# EAGLE board CT_schematic (EAGLE 7.6.0)

Size 100 x 80 mm. Coordinates in mm from the lower left corner, seen from the top.
Outline: 0,0 100,0 100,80 0,80 0,0
Copper layers (1*16): Top 0.035mm / dielectric 1.5mm / Bottom 0.035mm
Design rules "default": minimum track width 10mil, minimum drill 24mil, track to track 8mil, track to pad 8mil, pad to pad 8mil, via to via 8mil, smd to smd 8mil, copper to edge 40mil, drill to drill 8mil, minimum pad ring 10mil, minimum via ring 8mil, stop-mask expansion 4mil, vias tented up to drill 0mil, thermal gap 10mil

## Footprints (pad centres in the part's own frame; a part is rotated, then mirrored left to right if it is on the bottom)
C0603 = smd 0.8 x 0.8: 1 -0.762,0; 2 0.762,0
C0402 = smd 0.5 x 0.5: 1 -0.508,0; 2 0.508,0
C0805 = smd 1.2 x 1.3: 1 -1.016,0; 2 1.016,0
C1206 = smd 1.3 x 1.6: 1 -1.524,0; 2 1.524,0
2220 = smd 1.85 x 5.5: 1 -2.55,0; 2 2.55,0
R0603 = smd 0.8 x 0.8: 1 -0.762,0; 2 0.762,0
EXV-9H = smd 3.505 x 1.676: 1 -2.857,0; 2 2.857,0
L0603 = smd 0.8 x 0.8: 1 -0.762,0; 2 0.762,0
L1210 = smd 1.2 x 2.5: 1 -1.524,0; 2 1.524,0
WE-HCI_7030/7040/7050 = smd 2.5 x 3: 1 -2.45,0; 2 2.45,0
DR1040 = smd 1.6 x 3.2: 1 -4.458,0; 2 4.458,0
PJ-037B_PACKAGE = drill 3.7 square: 1 12,0 | drill 3.2 square: 2 6,0
TFBGA216 = smd 0.4 x 0.4: A1 -5.6,5.6; A2 -4.8,5.6; A3 -4,5.6; A4 -3.2,5.6; A5 -2.4,5.6; A6 -1.6,5.6; A7 -0.8,5.6; A8 0,5.6; A9 0.8,5.6; A10 1.6,5.6; A11 2.4,5.6; A12 3.2,5.6; A13 4,5.6; A14 4.8,5.6; A15 5.6,5.6; B1 -5.6,4.8; B2 -4.8,4.8; B3 -4,4.8; B4 -3.2,4.8; B5 -2.4,4.8; B6 -1.6,4.8; B7 -0.8,4.8; B8 0,4.8; B9 0.8,4.8; B10 1.6,4.8; B11 2.4,4.8; B12 3.2,4.8; B13 4,4.8; B14 4.8,4.8; B15 5.6,4.8; C1 -5.6,4; C2 -4.8,4; C3 -4,4; C4 -3.2,4; C5 -2.4,4; C6 -1.6,4; C7 -0.8,4; C8 0,4; C9 0.8,4; C10 1.6,4; C11 2.4,4; C12 3.2,4; C13 4,4; C14 4.8,4; C15 5.6,4; D1 -5.6,3.2; D2 -4.8,3.2; D3 -4,3.2; D4 -3.2,3.2; D5 -2.4,3.2; D6 -1.6,3.2; D7 -0.8,3.2; D8 0,3.2; D9 0.8,3.2; D10 1.6,3.2; D11 2.4,3.2; D12 3.2,3.2; D13 4,3.2; D14 4.8,3.2; D15 5.6,3.2; E1 -5.6,2.4; E2 -4.8,2.4; E3 -4,2.4; E4 -3.2,2.4; E5 -2.4,2.4; E6 -1.6,2.4; E7 -0.8,2.4; E8 0,2.4; E9 0.8,2.4; E10 1.6,2.4; E11 2.4,2.4; E12 3.2,2.4; E13 4,2.4; E14 4.8,2.4; E15 5.6,2.4; F1 -5.6,1.6; F2 -4.8,1.6; F3 -4,1.6; F4 -3.2,1.6; F5 -2.4,1.6; F6 -1.6,1.6; F7 -0.8,1.6; F8 0,1.6; F9 0.8,1.6; F10 1.6,1.6; F11 2.4,1.6; F12 3.2,1.6; F13 4,1.6; F14 4.8,1.6; F15 5.6,1.6; G1 -5.6,0.8; G2 -4.8,0.8; G3 -4,0.8; G4 -3.2,0.8; G5 -2.4,0.8; G6 -1.6,0.8; G10 1.6,0.8; G11 2.4,0.8; G12 3.2,0.8; G13 4,0.8; G14 4.8,0.8; G15 5.6,0.8; H1 -5.6,0; H2 -4.8,0; H3 -4,0; H4 -3.2,0; H5 -2.4,0; H6 -1.6,0; H10 1.6,0; H11 2.4,0; H12 3.2,0; H13 4,0; H14 4.8,0; H15 5.6,0; J1 -5.6,-0.8; J2 -4.8,-0.8; J3 -4,-0.8; J4 -3.2,-0.8; J5 -2.4,-0.8; J6 -1.6,-0.8; J10 1.6,-0.8; J11 2.4,-0.8; J12 3.2,-0.8; J13 4,-0.8; J14 4.8,-0.8; J15 5.6,-0.8; K1 -5.6,-1.6; K2 -4.8,-1.6; K3 -4,-1.6; K4 -3.2,-1.6; K5 -2.4,-1.6; K6 -1.6,-1.6; K7 -0.8,-1.6; K8 0,-1.6; K9 0.8,-1.6; K10 1.6,-1.6; K11 2.4,-1.6; K12 3.2,-1.6; K13 4,-1.6; K14 4.8,-1.6; K15 5.6,-1.6; L1 -5.6,-2.4; L2 -4.8,-2.4; L3 -4,-2.4; L4 -3.2,-2.4; L5 -2.4,-2.4; L6 -1.6,-2.4; L7 -0.8,-2.4; L8 0,-2.4; L9 0.8,-2.4; L10 1.6,-2.4; L11 2.4,-2.4; L12 3.2,-2.4; L13 4,-2.4; L14 4.8,-2.4; L15 5.6,-2.4; M1 -5.6,-3.2; M2 -4.8,-3.2; M3 -4,-3.2; M4 -3.2,-3.2; M5 -2.4,-3.2; M6 -1.6,-3.2; M7 -0.8,-3.2; M8 0,-3.2; M9 0.8,-3.2; M10 1.6,-3.2; M11 2.4,-3.2; M12 3.2,-3.2; M13 4,-3.2; M14 4.8,-3.2; M15 5.6,-3.2; N1 -5.6,-4; N2 -4.8,-4; N3 -4,-4; N4 -3.2,-4; N5 -2.4,-4; N6 -1.6,-4; N7 -0.8,-4; N8 0,-4; N9 0.8,-4; N10 1.6,-4; N11 2.4,-4; N12 3.2,-4; N13 4,-4; N14 4.8,-4; N15 5.6,-4; P1 -5.6,-4.8; P2 -4.8,-4.8; P3 -4,-4.8; P4 -3.2,-4.8; P5 -2.4,-4.8; P6 -1.6,-4.8; P7 -0.8,-4.8; P8 0,-4.8; P9 0.8,-4.8; P10 1.6,-4.8; P11 2.4,-4.8; P12 3.2,-4.8; P13 4,-4.8; P14 4.8,-4.8; P15 5.6,-4.8; R1 -5.6,-5.6; R2 -4.8,-5.6; R3 -4,-5.6; R4 -3.2,-5.6; R5 -2.4,-5.6; R6 -1.6,-5.6; R7 -0.8,-5.6; R8 0,-5.6; R9 0.8,-5.6; R10 1.6,-5.6; R11 2.4,-5.6; R12 3.2,-5.6; R13 4,-5.6; R14 4.8,-5.6; R15 5.6,-5.6
SOT-23-6 = smd 1.1 x 0.6: 1 -1.4,0.95; 2 -1.4,0; 3 -1.4,-0.95; 4 1.4,-0.95; 5 1.4,0; 6 1.4,0.95
SSOP-16 = smd 1.981 x 0.356: 1 -2.464,2.223; 2 -2.464,1.587; 3 -2.464,0.953; 4 -2.464,0.318; 5 -2.464,-0.318; 6 -2.464,-0.953; 7 -2.464,-1.587; 8 -2.464,-2.223; 9 2.464,-2.223; 10 2.464,-1.587; 11 2.464,-0.953; 12 2.464,-0.318; 13 2.464,0.318; 14 2.464,0.953; 15 2.464,1.587; 16 2.464,2.223
182-009-MALE = drill 1.194 pad 1.524 octagon: 1 -5.537,10.923; 2 -2.769,10.923; 3 0,10.923; 4 2.769,10.923; 5 5.537,10.923; 6 -4.153,8.08; 7 -1.384,8.08; 8 1.384,8.08; 9 4.153,8.08 | hole 3.048: -12.446,9.501; 12.446,9.501
SSOP-20 = smd 1.651 x 0.432: 1 -3.48,2.925; 2 -3.48,2.275; 3 -3.48,1.625; 4 -3.48,0.975; 5 -3.48,0.325; 6 -3.48,-0.325; 7 -3.48,-0.975; 8 -3.48,-1.625; 9 -3.48,-2.275; 10 -3.48,-2.925; 11 3.48,-2.925; 12 3.48,-2.275; 13 3.48,-1.625; 14 3.48,-0.975; 15 3.48,-0.325; 16 3.48,0.325; 17 3.48,0.975; 18 3.48,1.625; 19 3.48,2.275; 20 3.48,2.925
HTSS-105-01-G-D = drill 1 pad 1.8 square: 1 0,0 | drill 1 pad 1.8: 2 0,2.54; 3 2.54,0; 4 2.54,2.54; 5 5.08,0; 6 5.08,2.54; 7 7.62,0; 8 7.62,2.54; 9 10.16,0; 10 10.16,2.54
MOLEX_47219-2001 = smd 0.8 x 1.5: 1 3.2,-2.1; 2 2.1,-2.1; 3 1,-2.1; 4 -0.1,-2.1; 5 -1.2,-2.1; 6 -2.3,-2.1; 7 -3.4,-2.1; 8 -4.5,-2.1 | smd 1.5 x 2.05: G1 6.875,-4.7; G2 6.875,3.6; G3 -6.875,3.6; G4 -6.875,-4.7
QFN-16 = smd 0.813 x 0.305: 1 -1.448,0.75; 2 -1.448,0.25; 3 -1.448,-0.25; 4 -1.448,-0.75; 9 1.448,-0.75; 10 1.448,-0.25; 11 1.448,0.25; 12 1.448,0.75 | smd 0.305 x 0.813: 5 -0.75,-1.448; 6 -0.25,-1.448; 7 0.25,-1.448; 8 0.75,-1.448; 13 0.75,1.448; 14 0.25,1.448; 15 -0.25,1.448; 16 -0.75,1.448 | smd 1.803 x 1.803: 17 0,0
USB-A-H = drill 0.914: 1 2.718,3.493; 2 2.718,1.003; 3 2.718,-1.003; 4 2.718,-3.493 | drill 2.311: 5 0,-6.566; 6 0,6.566
SOT143B = smd 1 x 0.7: 1 -0.75,-1 | smd 0.6 x 0.7: 2 0.95,-1; 3 0.95,1; 4 -0.95,1
ABS07-32.768KHZ-7-T = smd 1.1 x 2.4: 1 -2.5,0; 2 0,0
ABLS-25.000MHZ-B2F-T = smd 5.6 x 2.8: 1 -3.81,0; 2 5.69,0
WSON-8 = smd 0.3 x 0.6: 1 -0.75,0; 2 0.05,0; 3 0.85,0; 4 1.65,0; 5 1.65,3.8; 6 0.85,3.8; 7 0.05,3.8; 8 -0.75,3.8 | smd 3 x 2.6: PAD 0.45,1.9
QFN-16_EP = smd 0.805 x 0.3: 1 -1.452,0.75; 2 -1.452,0.25; 3 -1.452,-0.25; 4 -1.452,-0.75; 9 1.452,-0.75; 10 1.452,-0.25; 11 1.452,0.25; 12 1.452,0.75 | smd 0.3 x 0.805: 5 -0.75,-1.452; 6 -0.25,-1.452; 7 0.25,-1.452; 8 0.75,-1.452; 13 0.75,1.452; 14 0.25,1.452; 15 -0.25,1.452; 16 -0.75,1.452 | smd 1.55 x 1.55: 17 0,0
QFN-38_UHF = smd 0.75 x 0.3: 1 -2.4,2.75; 2 -2.4,2.25; 3 -2.4,1.75; 4 -2.4,1.25; 6 -2.4,0.25; 7 -2.4,-0.25; 8 -2.4,-0.75; 9 -2.4,-1.25; 10 -2.4,-1.75; 11 -2.4,-2.25; 12 -2.4,-2.75; 20 2.4,-2.75; 21 2.4,-2.25; 22 2.4,-1.75; 23 2.4,-1.25; 24 2.4,-0.75; 25 2.4,-0.25; 26 2.4,0.25; 27 2.4,0.75; 28 2.4,1.25; 29 2.4,1.75; 30 2.4,2.25; 31 2.4,2.75 | smd 0.758 x 0.3: 5 -2.4,0.75 | smd 0.3 x 0.75: 13 -1.5,-3.4; 14 -1,-3.4; 15 -0.5,-3.4; 16 0,-3.4; 17 0.5,-3.4; 18 1,-3.4; 19 1.5,-3.4; 32 1.5,3.4; 33 1,3.4; 34 0.5,3.4; 35 0,3.4; 36 -0.5,3.4; 37 -1,3.4; 38 -1.5,3.4 | smd 3.2 x 5.2: 39 0,0
IRF8306MTRPBF = smd 0.9 x 1.85: 1 0,0; 2 0,-2.35; 6 6.4,0; 7 6.4,-2.35 | smd 0.75 x 0.75: 3 1.75,-1.175 | smd 1.45 x 0.87: 4 3.5,-0.565; 5 3.5,-1.785
SW_4-1437565-2 = smd 1.4 x 2.1: 1 -2.23,4.55; 2 -2.23,-4.55; 3 2.23,4.55; 4 2.23,-4.55
LGM67K-G1J2-24-Z = smd 0.8 x 1.4: A -2,0; C 0,0
NC7SZ125M5X = smd 1.3 x 0.7: 1 -1.3,0.95; 2 -1.3,0; 3 -1.3,-0.95; 4 1.3,-0.95; 5 1.3,0.95

## Placement (x,y rotation side)
C1  1e-06  [C0603]  -91.44,92.71 0 top  (outside the outline)
C2  1e-07  [C0603]  -95.25,92.71 0 top  (outside the outline)
C3  1e-07  [C0603]  -99.06,92.71 0 top  (outside the outline)
C4  1e-07  [C0603]  -15.24,97.79 0 top  (outside the outline)
C5  1e-07  [C0603]  -19.05,97.79 0 top  (outside the outline)
C6  1e-07  [C0603]  -22.86,97.79 0 top  (outside the outline)
C7  1e-07  [C0603]  -26.67,97.79 0 top  (outside the outline)
C8  1e-07  [C0603]  -30.48,97.79 0 top  (outside the outline)
C9  1e-07  [C0603]  -34.29,97.79 0 top  (outside the outline)
C10  1e-07  [C0603]  -38.1,97.79 0 top  (outside the outline)
C11  1e-07  [C0603]  -41.91,97.79 0 top  (outside the outline)
C12  1e-07  [C0603]  -45.72,97.79 0 top  (outside the outline)
C13  1e-07  [C0603]  -49.53,97.79 0 top  (outside the outline)
C14  1e-07  [C0603]  -53.34,97.79 0 top  (outside the outline)
C15  1e-07  [C0603]  -57.15,97.79 0 top  (outside the outline)
C16  1e-07  [C0603]  -60.96,97.79 0 top  (outside the outline)
C17  1e-07  [C0603]  -64.77,97.79 0 top  (outside the outline)
C18  1e-07  [C0603]  -68.58,97.79 0 top  (outside the outline)
C19  1e-07  [C0603]  -72.39,97.79 0 top  (outside the outline)
C20  1e-07  [C0603]  -76.2,97.79 0 top  (outside the outline)
C21  1e-07  [C0603]  -80.01,97.79 0 top  (outside the outline)
C22  4.7e-06  [C0603]  -80.01,92.71 0 top  (outside the outline)
C23  1e-08  [C0603]  -83.82,97.79 0 top  (outside the outline)
C24  1e-06  [C0603]  -87.63,97.79 0 top  (outside the outline)
C25  1e-07  [C0603]  -91.44,97.79 0 top  (outside the outline)
C26  1e-07  [C0603]  -95.25,97.79 0 top  (outside the outline)
C27  1e-07  [C0603]  -99.06,97.79 0 top  (outside the outline)
C28  1e-07  [C0603]  -15.24,102.87 0 top  (outside the outline)
C29  1e-11  [C0402]  -34.29,107.95 0 top  (outside the outline)
C30  1e-11  [C0402]  -38.1,107.95 0 top  (outside the outline)
C31  1e-11  [C0402]  -41.91,107.95 0 top  (outside the outline)
C32  1e-11  [C0402]  -45.72,107.95 0 top  (outside the outline)
C33  1e-06  [C0603]  -19.05,102.87 0 top  (outside the outline)
C34  1e-06  [C0603]  -22.86,102.87 0 top  (outside the outline)
C35  2.2e-07  [C0603]  -83.82,92.71 0 top  (outside the outline)
C36  1e-06  [C0603]  -26.67,102.87 0 top  (outside the outline)
C37  1e-06  [C0603]  -30.48,102.87 0 top  (outside the outline)
C38  1e-06  [C0603]  -34.29,102.87 0 top  (outside the outline)
C39  1e-06  [C0603]  -38.1,102.87 0 top  (outside the outline)
C40  1e-06  [C0603]  -41.91,102.87 0 top  (outside the outline)
C41  4.7e-06  [C0805]  -90.17,74.93 0 top  (outside the outline)
C42  1e-06  [C0603]  -45.72,102.87 0 top  (outside the outline)
C43  1e-06  [C0603]  -49.53,102.87 0 top  (outside the outline)
C44  1e-06  [C0603]  -53.34,102.87 0 top  (outside the outline)
C45  4.7e-06  [C0805]  -95.25,74.93 0 top  (outside the outline)
C46  1e-07  [C0402]  -49.53,107.95 0 top  (outside the outline)
C47  1e-05  [C0805]  -100.33,74.93 0 top  (outside the outline)
C48  4.7e-06  [C0805]  -15.24,82.55 0 top  (outside the outline)
C49  1e-07  [C0402]  -53.34,107.95 0 top  (outside the outline)
C50  1e-07  [C0402]  -57.15,107.95 0 top  (outside the outline)
C51  1e-08  [C0402]  -60.96,107.95 0 top  (outside the outline)
C52  1e-05  [C1206]  -67.31,74.93 0 top  (outside the outline)
C53  1e-05  [C0805]  -20.32,82.55 0 top  (outside the outline)
C54  1e-05  [C0805]  -25.4,82.55 0 top  (outside the outline)
C55  1e-06  [C0603]  -57.15,102.87 0 top  (outside the outline)
C56  1e-07  [C0402]  -64.77,107.95 0 top  (outside the outline)
C57  6.8e-05  [2220]  -52.07,58.42 0 top  (outside the outline)
C58  1e-05  [C0805]  -30.48,82.55 0 top  (outside the outline)
C59  1e-06  [C0603]  -60.96,102.87 0 top  (outside the outline)
C60  1e-07  [C0402]  -68.58,107.95 0 top  (outside the outline)
C61  6.8e-05  [2220]  -59.69,58.42 0 top  (outside the outline)
C62  1e-08  [C0402]  -72.39,107.95 0 top  (outside the outline)
C63  1e-05  [C1206]  -73.66,74.93 0 top  (outside the outline)
C64  1e-05  [C0805]  -35.56,82.55 0 top  (outside the outline)
C65  1e-07  [C0402]  -76.2,107.95 0 top  (outside the outline)
C66  2.2e-06  [C0603]  -87.63,92.71 0 top  (outside the outline)
C67  2.45e-08  [R0603]  -66.04,87.63 0 top  (outside the outline)
C68  2.8258362168397e-09  [R0603]  -45.72,82.55 0 top  (outside the outline)
C69  7.105e-09  [R0603]  -58.42,82.55 0 top  (outside the outline)
C70  0.0001  [EXV-9H]  -46.99,67.31 0 top  (outside the outline)
C71  0.0001  [EXV-9H]  -58.42,67.31 0 top  (outside the outline)
C72  1e-08  [C0402]  -80.01,107.95 0 top  (outside the outline)
F1  240.0  [L0603]  -64.77,102.87 0 top  (outside the outline)
I1  1e-05  [L1210]  -48.26,76.2 0 top  (outside the outline)
I2  1.5e-05  [L1210]  -54.61,76.2 0 top  (outside the outline)
I3  1.5e-05  [L1210]  -60.96,76.2 0 top  (outside the outline)
I4  3.3e-06  [WE-HCI_7030/7040/7050]  -88.9,27.94 0 top  (outside the outline)
I5  3.8e-06  [DR1040]  -38.1,45.72 0 top  (outside the outline)
J1  PJ-037B  [PJ-037B_PACKAGE]  -83.82,29.21 0 top  (outside the outline)
R2  1000.0  [R0603]  -68.58,102.87 0 top  (outside the outline)
R7  4700.0  [R0603]  -72.39,102.87 0 top  (outside the outline)
R8  2200.0  [R0603]  -76.2,102.87 0 top  (outside the outline)
R10  2200.0  [R0603]  -80.01,102.87 0 top  (outside the outline)
R12  47000.0  [R0603]  -71.12,87.63 0 top  (outside the outline)
R13  10000.0  [R0603]  -76.2,87.63 0 top  (outside the outline)
R14  10000.0  [R0603]  -81.28,87.63 0 top  (outside the outline)
R15  10000.0  [R0603]  -86.36,87.63 0 top  (outside the outline)
R16  1270.0  [R0603]  -83.82,102.87 0 top  (outside the outline)
R17  10000.0  [R0603]  -91.44,87.63 0 top  (outside the outline)
R18  10000.0  [R0603]  -96.52,87.63 0 top  (outside the outline)
R19  100000.0  [R0603]  -63.5,82.55 0 top  (outside the outline)
R20  100000.0  [R0603]  -68.58,82.55 0 top  (outside the outline)
R21  100000.0  [R0603]  -73.66,82.55 0 top  (outside the outline)
R22  100000.0  [R0603]  -78.74,82.55 0 top  (outside the outline)
R23  100000.0  [R0603]  -83.82,82.55 0 top  (outside the outline)
R24  100000.0  [R0603]  -88.9,82.55 0 top  (outside the outline)
R25  100000.0  [R0603]  -93.98,82.55 0 top  (outside the outline)
R26  100000.0  [R0603]  -99.06,82.55 0 top  (outside the outline)
R27  100000.0  [R0603]  -15.24,87.63 0 top  (outside the outline)
R28  100000.0  [R0603]  -20.32,87.63 0 top  (outside the outline)
R29  100000.0  [R0603]  -25.4,87.63 0 top  (outside the outline)
R30  100000.0  [R0603]  -30.48,87.63 0 top  (outside the outline)
R31  100000.0  [R0603]  -35.56,87.63 0 top  (outside the outline)
R32  10000.0  [R0603]  -15.24,92.71 0 top  (outside the outline)
R33  100000.0  [R0603]  -40.64,87.63 0 top  (outside the outline)
R34  200.0  [R0603]  -87.63,102.87 0 top  (outside the outline)
R35  1000.0  [R0603]  -91.44,102.87 0 top  (outside the outline)
R36  20000.0  [R0603]  -20.32,92.71 0 top  (outside the outline)
R37  62000.0  [R0603]  -25.4,92.71 0 top  (outside the outline)
R38  300000.0  [R0603]  -45.72,87.63 0 top  (outside the outline)
R39  20000.0  [R0603]  -30.48,92.71 0 top  (outside the outline)
R40  150000.0  [R0603]  -50.8,87.63 0 top  (outside the outline)
R41  300000.0  [R0603]  -55.88,87.63 0 top  (outside the outline)
R42  100000.0  [R0603]  -60.96,87.63 0 top  (outside the outline)
R43  200.0  [R0603]  -95.25,102.87 0 top  (outside the outline)
R44  1000.0  [R0603]  -99.06,102.87 0 top  (outside the outline)
R45  10000.0  [R0603]  -35.56,92.71 0 top  (outside the outline)
R46  75000.0  [R0603]  -40.64,92.71 0 top  (outside the outline)
R47  10000.0  [R0603]  -45.72,92.71 0 top  (outside the outline)
R48  10000.0  [R0603]  -50.8,92.71 0 top  (outside the outline)
R49  95300.0  [R0603]  -55.88,92.71 0 top  (outside the outline)
R50  95300.0  [R0603]  -60.96,92.71 0 top  (outside the outline)
R51  10000.0  [R0603]  -66.04,92.71 0 top  (outside the outline)
R52  10000.0  [R0603]  -71.12,92.71 0 top  (outside the outline)
R53  10000.0  [R0603]  -76.2,92.71 0 top  (outside the outline)
R54  44545.454545455  [R0603]  -53.34,82.55 0 top  (outside the outline)
U1  STM32F765NGH6  [TFBGA216]  -24.13,31.75 0 top  (outside the outline)
U2  MAX4995AAUT+T  [SOT-23-6]  -78.74,74.93 0 top  (outside the outline)
U3  LTC2804CGN-1#PBF  [SSOP-16]  -59.69,45.72 0 top  (outside the outline)
U4  182-009-113R531  [182-009-MALE]  -36.83,6.35 0 top  (outside the outline)
U5  MAX3218EAP+T  [SSOP-20]  -33.02,57.15 0 top  (outside the outline)
U6  182-009-113R531  [182-009-MALE]  -76.2,6.35 0 top  (outside the outline)
U7  MAX3218EAP+T  [SSOP-20]  -43.18,57.15 0 top  (outside the outline)
U8  HTSS-105-01-G-D  [HTSS-105-01-G-D]  -78.74,44.45 0 top  (outside the outline)
U9  0472192001  [MOLEX_47219-2001]  -58.42,30.48 0 top  (outside the outline)
U10  MMA8451QT  [QFN-16]  -27.94,107.95 0 top  (outside the outline)
U11  61400416021  [USB-A-H]  -38.1,30.48 0 top  (outside the outline)
U12  prtr5v0u2ax  [SOT143B]  -92.71,107.95 0 top  (outside the outline)
U13  ABS07-32.768KHZ-7-T  [ABS07-32.768KHZ-7-T]  -27.94,76.2 0 top  (outside the outline)
U14  ABLS-25.000MHZ-B2F-T  [ABLS-25.000MHZ-B2F-T]  -77.47,67.31 0 top  (outside the outline)
U15  LP3878SDX-ADJ/NOPB  [WSON-8]  -81.28,55.88 0 top  (outside the outline)
U16  LTC3601EUD#PBF  [QFN-16_EP]  -15.24,107.95 0 top  (outside the outline)
U17  LTC3601EUD#PBF  [QFN-16_EP]  -21.59,107.95 0 top  (outside the outline)
U18  LP3878SDX-ADJ/NOPB  [WSON-8]  -30.48,66.04 0 top  (outside the outline)
U19  LTC2928CUHF#PBF  [QFN-38_UHF]  -36.83,67.31 0 top  (outside the outline)
U20  IRF8306MTRPbF  [IRF8306MTRPBF]  -95.25,46.99 0 top  (outside the outline)
U21  IRF8306MTRPbF  [IRF8306MTRPBF]  -26.67,58.42 0 top  (outside the outline)
U22  4-1437565-2  [SW_4-1437565-2]  -27.94,46.99 0 top  (outside the outline)
U23  Q65110A2395  [LGM67K-G1J2-24-Z]  -36.83,76.2 0 top  (outside the outline)
U24  nc7sz125m5x  [NC7SZ125M5X]  -83.82,74.93 0 top  (outside the outline)

## Library data of the parts
C1-C72 F1 I1-I5 J1 R2 R7 R8 R10 R12-R54 U1-U24 = circuit_tree

## Nets
CLK_CRYSTAL_U1_E1: C29.1 U1.E1 U13.1
CLK_CRYSTAL_U1_F1: C30.1 U1.F1 U13.2
CLK_CRYSTAL_U1_G1: C31.1 U1.G1 U14.1
CLK_CRYSTAL_U1_H1: C32.1 U1.H1 U14.2
GND: C1.2 C2.2 C3.2 C4.2 C5.2 C6.2 C7.2 C8.2 C9.2 C10.2 C11.2 C12.2 C13.2 C14.2 C15.2 C16.2 C17.2 C18.2 C19.2 C20.2 C21.2 C22.2 C23.2 C24.2 C25.2 C26.2 C27.2 C28.2 C29.2 C30.2 C31.2 C32.2 C33.2 C34.2 C36.2 C37.2 C38.2 C39.2 C40.2 C42.2 C43.2 C44.2 C46.2 C47.2 C48.2 C49.2 C50.2 C51.2 C52.2 C53.2 C54.2 C55.2 C57.1 C57.2 C58.2 C59.2 C61.1 C61.2 C62.2 C63.2 C64.2 C65.2 C66.2 C67.2 C68.2 C69.2 C70.2 C71.2 C72.2 J1.2 R2.2 R12.2 R13.2 R16.2 R18.2 R32.2 R35.2 R36.2 R38.2 R39.2 R41.2 R44.2 R46.2 R49.2 R50.2 R51.2 R52.2 R53.2 U1.F2 U1.F6 U1.F7 U1.F8 U1.F9 U1.F10 U1.G6 U1.G10 U1.H6 U1.H10 U1.J6 U1.J10 U1.K6 U1.K7 U1.K8 U1.K9 U1.K10 U1.L6 U1.M1 U1.N1 U2.2 U3.8 U4.5 U5.5 U5.17 U5.20 U6.5 U7.5 U7.17 U7.20 U8.9 U9.6 U9.G1 U9.G2 U9.G3 U9.G4 U10.5 U10.10 U10.12 U10.17 U11.4 U11.5 U11.6 U12.1 U15.3 U15.PAD U16.1 U16.9 U16.17 U17.1 U17.9 U17.17 U18.3 U18.PAD U19.8 U19.9 U19.10 U19.12 U19.13 U19.24 U19.25 U19.30 U19.32 U19.39 U23.C U24.1 U24.3
NET_U1_A7: R8.1 U1.A7 U10.4
NET_U1_B4: R10.1 U1.B4 U10.6
NET_U1_D15: R16.1 U1.D15
NET_U1_E5: R14.1 U1.E5
NET_U1_E6: R13.1 U1.E6
NET_U1_E11: C28.1 U1.E11
NET_U1_J1: R7.1 U1.J1 U24.4
NET_U1_L5: R15.1 U1.L5
NET_U1_R1: C23.1 C24.1 F1.1 U1.P1 U1.R1
NET_U1_R14: U23.A
NET_U1_R15: U22.3 U22.4
NET_U2_3: R12.1 U2.3
NET_U3_6: C33.1 U3.6
NET_U3_7: C35.1 I1.2 U3.7
NET_U3_9: C34.1 U3.9
NET_U3_10: C35.2 U3.10
NET_U3_11: R19.1 U3.11
NET_U4_2: U3.1 U4.2
NET_U4_3: U3.3 U4.3
NET_U4_7: U3.2 U4.7
NET_U4_8: U3.4 U4.8
NET_U5_1: I2.1 U5.1
NET_U5_2: R20.1 U5.2
NET_U5_3: R21.1 U5.3
NET_U5_4: R22.1 U5.4
NET_U5_15: C40.1 U5.15
NET_U5_16: C41.2 U5.16
NET_U5_18: C41.1 U5.18
NET_U5_19: C39.1 U5.19
NET_U6_2: U5.12 U6.2
NET_U6_3: U5.14 U6.3
NET_U6_7: U5.11 U6.7
NET_U6_8: U5.13 U6.8
NET_U7_1: I3.1 U7.1
NET_U7_2: R23.1 U7.2
NET_U7_3: R24.1 U7.3
NET_U7_4: R25.1 U7.4
NET_U7_15: C44.1 U7.15
NET_U7_16: C45.2 U7.16
NET_U7_18: C45.1 U7.18
NET_U7_19: C43.1 U7.19
NET_U8_3: U7.12 U8.3
NET_U8_4: U7.11 U8.4
NET_U8_5: U7.14 U8.5
NET_U8_6: U7.13 U8.6
NET_U10_2: C50.1 U10.2
NET_U10_7: R32.1 U10.7
NET_U15_1: C51.1 U15.1
NET_U15_6: R34.2 R35.1 U15.6
NET_U15_8: R33.1 U15.8
NET_U16_3: C56.2 I4.1 U16.3 U16.4
NET_U16_6: C56.1 U16.6
NET_U16_7: C55.1 U16.7 U16.12
NET_U16_10: R38.1 U16.10
NET_U16_11: R36.1 R37.1 U16.11
NET_U16_14: U16.14
NET_U16_ATNET_3: I4.2 R37.2
NET_U17_3: C60.2 I5.1 U17.3 U17.4
NET_U17_6: C60.1 U17.6
NET_U17_7: C59.1 U17.7 U17.12
NET_U17_10: R41.1 U17.10
NET_U17_11: R39.1 R40.1 U17.11
NET_U17_14: U17.14
NET_U17_ATNET_3: I5.2 R40.2
NET_U18_1: C62.1 U18.1
NET_U18_6: R43.2 R44.1 U18.6
NET_U18_8: R42.1 U18.8
NET_U19_3: R52.1 U19.3
NET_U19_6: R49.1 U19.6
NET_U19_7: R50.1 U19.7
NET_U19_16: R51.1 R54.1 U19.16
NET_U19_18: R48.1 U19.18
NET_U19_19: R47.1 U19.19 U19.20
NET_U19_21: R45.1 R46.1 U19.21 U24.2
NET_U19_26: C68.1 U19.26
NET_U19_27: C67.1 U19.27
NET_U19_28: C69.1 U19.28
NET_U19_38: R53.1 U19.38
NET_U20_3: U19.2 U20.3
NET_U21_3: U19.37 U21.3
NET_U22_1: R2.1 U22.1 U22.2
PROC_GPIO_TO_U1_USB_FAULT: R17.1 U1.A2 U2.6
PROC_GPIO_TO_U1_VBUS_EN: R18.1 U1.A1 U2.4
PROC_SDMMC2_CK: R27.1 U1.B11 U9.5
PROC_SDMMC2_CMD: R26.1 U1.A11 U9.3
PROC_SDMMC2_D0: R28.1 U1.D9 U9.7
PROC_SDMMC2_D1: R29.1 U1.C8 U9.8
PROC_SDMMC2_D2: R30.1 U1.A10 U9.1
PROC_SDMMC2_D3: R31.1 U1.A9 U9.2
PROC_UART4_CTS: U1.R5 U5.8
PROC_UART4_RTS: U1.A13 U5.10
PROC_UART4_RX: U1.B12 U5.9
PROC_UART4_TX: U1.B14 U5.7
PROC_UART5_CTS: U1.F14 U7.8
PROC_UART5_RTS: U1.G14 U7.10
PROC_UART5_RX: U1.A8 U7.9
PROC_UART5_TX: U1.A12 U7.7
PROC_UART7_CTS: U1.L2 U3.13
PROC_UART7_RTS: U1.L3 U3.15
PROC_UART7_RX: U1.F15 U3.16
PROC_UART7_TX: U1.K1 U3.14
PROC_USB_OTG_FS_DM: U1.C15 U11.2 U12.3
PROC_USB_OTG_FS_DP: U1.B15 U11.3 U12.2
PROC_USB_OTG_FS_VBUS: U1.E15 U2.1 U11.1 U12.4
VCC_6V1: C65.1 C66.1 C70.1 C71.1 J1.1 R45.2 R47.2 R48.2 R54.2 U19.11 U19.22 U20.1 U20.2 U20.6 U20.7 U21.1 U21.2 U21.6 U21.7
VCC_S1_6V1: C52.1 C54.1 C58.1 R33.2 U15.4 U16.15 U16.16 U17.15 U17.16 U20.4 U20.5
VCC_S2_6V1: C63.1 R42.2 U18.4 U21.4 U21.5
VCC_TIER1_1V2: C27.1 C53.1 R34.1 U1.L11 U15.5
VCC_TIER1_2V5: C1.1 C2.1 C3.1 C4.1 C5.1 C6.1 C7.1 C8.1 C9.1 C10.1 C11.1 C12.1 C13.1 C14.1 C15.1 C16.1 C17.1 C18.1 C19.1 C20.1 C21.1 C22.1 C25.1 C26.1 C36.1 C37.1 C38.1 C42.1 C46.1 C47.1 C48.1 C49.1 C57.2 C72.1 F1.2 I1.1 I2.2 I3.2 I4.2 R7.2 R8.2 R10.2 R14.2 R15.2 R17.2 R19.2 R20.2 R21.2 R22.2 R23.2 R24.2 R25.2 R26.2 R27.2 R28.2 R29.2 R30.2 R31.2 R37.2 U1.C1 U1.E7 U1.E8 U1.E9 U1.E10 U1.F4 U1.F5 U1.F11 U1.G5 U1.G11 U1.H5 U1.H11 U1.J5 U1.J11 U1.K5 U1.K11 U1.L7 U1.L8 U1.L9 U1.L10 U3.5 U3.12 U5.6 U7.6 U9.4 U10.1 U10.14 U16.8 U24.5
VCC_TIER1_5V0: C61.2 I5.2 R40.2 U2.5 U17.8
VCC_TIER2_1V2: C64.1 R43.1 U18.5

## Tracks (layer width: path | path; a pad name or v marks a point on that pad's centre or on a via)
CLK_CRYSTAL_U1_E1  (2 unrouted)
CLK_CRYSTAL_U1_F1  (2 unrouted)
CLK_CRYSTAL_U1_G1  (2 unrouted)
CLK_CRYSTAL_U1_H1  (2 unrouted)
GND  (154 unrouted)
NET_U1_A7  (2 unrouted)
NET_U1_B4  (2 unrouted)
NET_U1_D15  (1 unrouted)
NET_U1_E5  (1 unrouted)
NET_U1_E6  (1 unrouted)
NET_U1_E11  (1 unrouted)
NET_U1_J1  (2 unrouted)
NET_U1_L5  (1 unrouted)
NET_U1_R1  (4 unrouted)
NET_U1_R15  (1 unrouted)
NET_U2_3  (1 unrouted)
NET_U3_6  (1 unrouted)
NET_U3_7  (2 unrouted)
NET_U3_9  (1 unrouted)
NET_U3_10  (1 unrouted)
NET_U3_11  (1 unrouted)
NET_U4_2  (1 unrouted)
NET_U4_3  (1 unrouted)
NET_U4_7  (1 unrouted)
NET_U4_8  (1 unrouted)
NET_U5_1  (1 unrouted)
NET_U5_2  (1 unrouted)
NET_U5_3  (1 unrouted)
NET_U5_4  (1 unrouted)
NET_U5_15  (1 unrouted)
NET_U5_16  (1 unrouted)
NET_U5_18  (1 unrouted)
NET_U5_19  (1 unrouted)
NET_U6_2  (1 unrouted)
NET_U6_3  (1 unrouted)
NET_U6_7  (1 unrouted)
NET_U6_8  (1 unrouted)
NET_U7_1  (1 unrouted)
NET_U7_2  (1 unrouted)
NET_U7_3  (1 unrouted)
NET_U7_4  (1 unrouted)
NET_U7_15  (1 unrouted)
NET_U7_16  (1 unrouted)
NET_U7_18  (1 unrouted)
NET_U7_19  (1 unrouted)
NET_U8_3  (1 unrouted)
NET_U8_4  (1 unrouted)
NET_U8_5  (1 unrouted)
NET_U8_6  (1 unrouted)
NET_U10_2  (1 unrouted)
NET_U10_7  (1 unrouted)
NET_U15_1  (1 unrouted)
NET_U15_6  (2 unrouted)
NET_U15_8  (1 unrouted)
NET_U16_3  (3 unrouted)
NET_U16_6  (1 unrouted)
NET_U16_7  (2 unrouted)
NET_U16_10  (1 unrouted)
NET_U16_11  (2 unrouted)
NET_U16_ATNET_3  (1 unrouted)
NET_U17_3  (3 unrouted)
NET_U17_6  (1 unrouted)
NET_U17_7  (2 unrouted)
NET_U17_10  (1 unrouted)
NET_U17_11  (2 unrouted)
NET_U17_ATNET_3  (1 unrouted)
NET_U18_1  (1 unrouted)
NET_U18_6  (2 unrouted)
NET_U18_8  (1 unrouted)
NET_U19_3  (1 unrouted)
NET_U19_6  (1 unrouted)
NET_U19_7  (1 unrouted)
NET_U19_16  (2 unrouted)
NET_U19_18  (1 unrouted)
NET_U19_19  (2 unrouted)
NET_U19_21  (3 unrouted)
NET_U19_26  (1 unrouted)
NET_U19_27  (1 unrouted)
NET_U19_28  (1 unrouted)
NET_U19_38  (1 unrouted)
NET_U20_3  (1 unrouted)
NET_U21_3  (1 unrouted)
NET_U22_1  (2 unrouted)
PROC_GPIO_TO_U1_USB_FAULT  (2 unrouted)
PROC_GPIO_TO_U1_VBUS_EN  (2 unrouted)
PROC_SDMMC2_CK  (2 unrouted)
PROC_SDMMC2_CMD  (2 unrouted)
PROC_SDMMC2_D0  (2 unrouted)
PROC_SDMMC2_D1  (2 unrouted)
PROC_SDMMC2_D2  (2 unrouted)
PROC_SDMMC2_D3  (2 unrouted)
PROC_UART4_CTS  (1 unrouted)
PROC_UART4_RTS  (1 unrouted)
PROC_UART4_RX  (1 unrouted)
PROC_UART4_TX  (1 unrouted)
PROC_UART5_CTS  (1 unrouted)
PROC_UART5_RTS  (1 unrouted)
PROC_UART5_RX  (1 unrouted)
PROC_UART5_TX  (1 unrouted)
PROC_UART7_CTS  (1 unrouted)
PROC_UART7_RTS  (1 unrouted)
PROC_UART7_RX  (1 unrouted)
PROC_UART7_TX  (1 unrouted)
PROC_USB_OTG_FS_DM  (2 unrouted)
PROC_USB_OTG_FS_DP  (2 unrouted)
PROC_USB_OTG_FS_VBUS  (3 unrouted)
VCC_6V1  (18 unrouted)
VCC_S1_6V1  (10 unrouted)
VCC_S2_6V1  (4 unrouted)
VCC_TIER1_1V2  (4 unrouted)
VCC_TIER1_2V5  (87 unrouted)
VCC_TIER1_5V0  (4 unrouted)
VCC_TIER2_1V2  (2 unrouted)